# Altium PCB ANE_0002_02AA_0000.PcbDoc
Units mm, origin at the board's own origin, x right, y up, seen from the top; angles counter-clockwise.
Board outline 84 x 65 mm, 2 copper layers (Top Layer, Bottom Layer), stack 0.271 mm thick; 76 components, 44 nets, 229 pads, 61 vias.
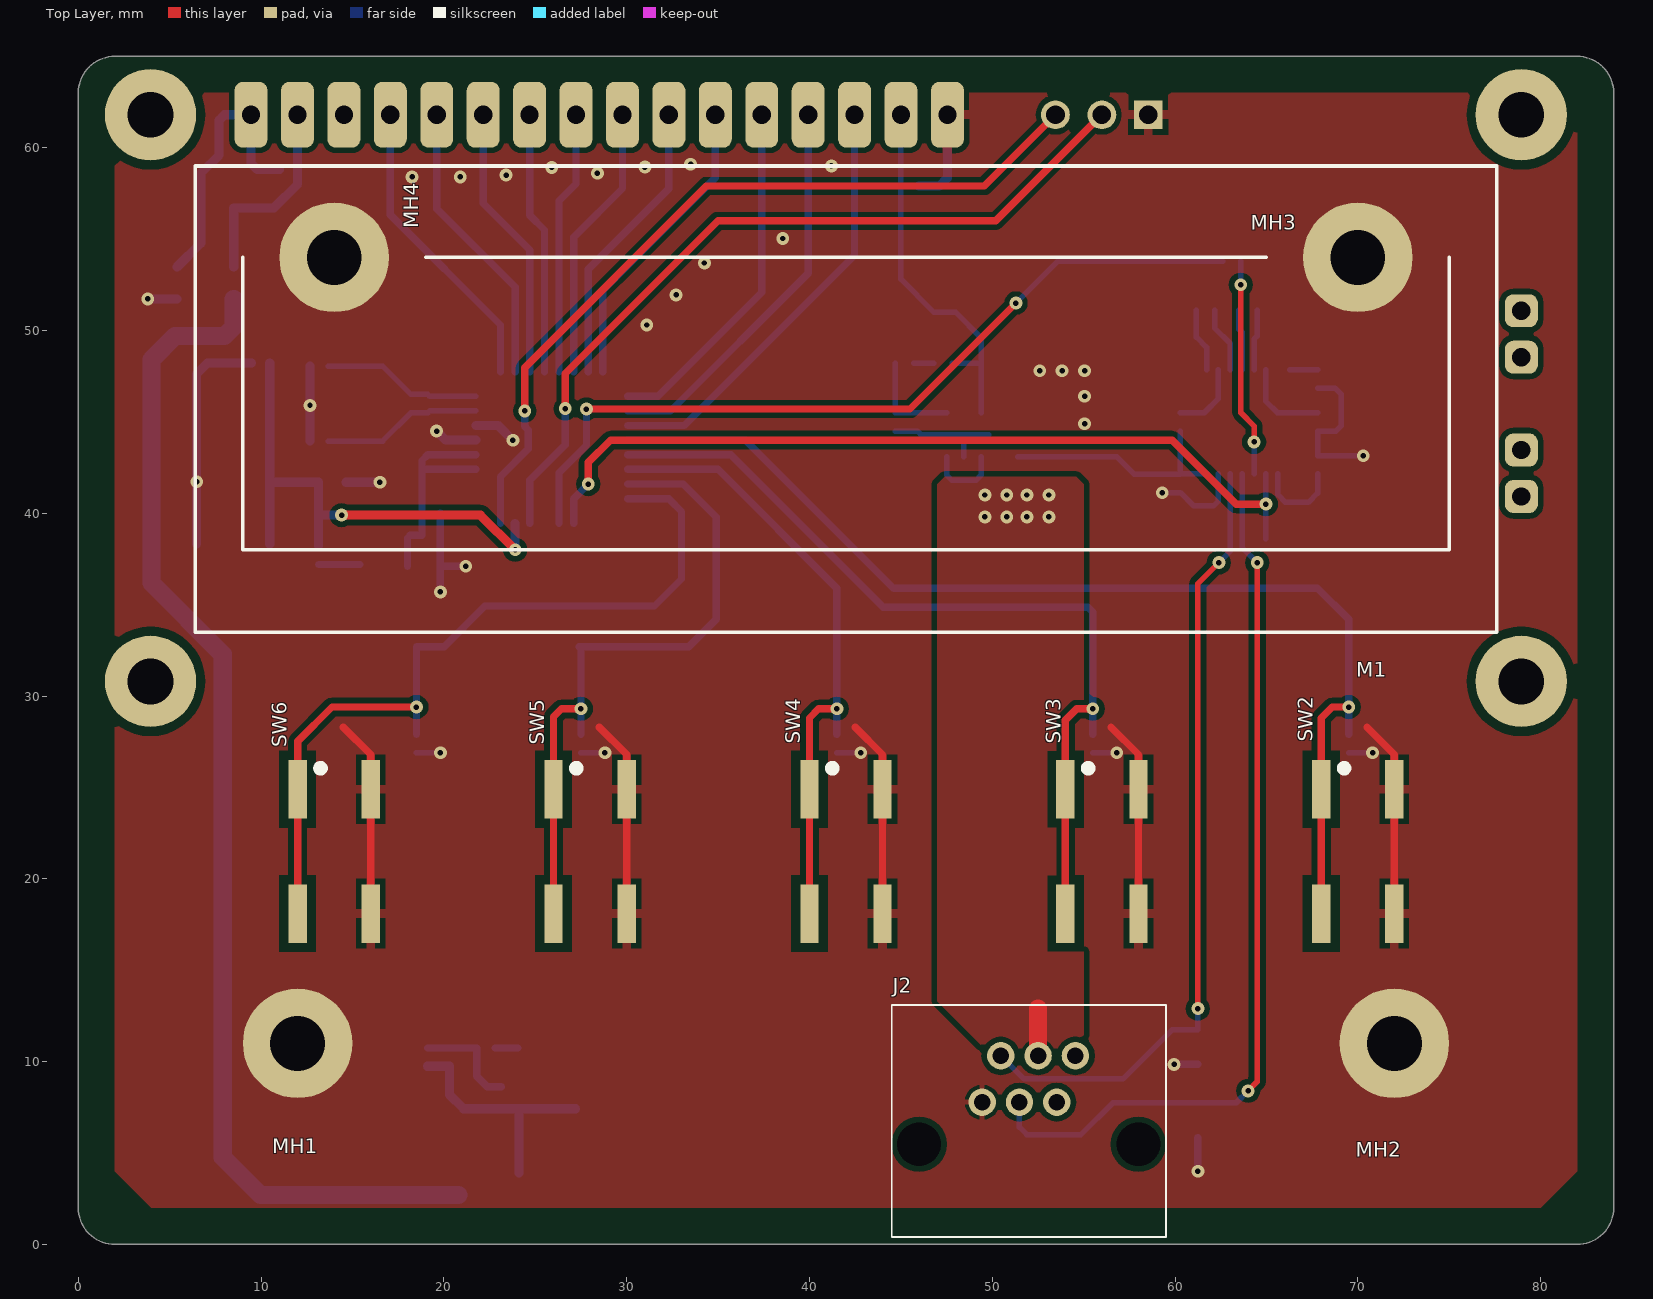
[diagram p0: Top Layer view]
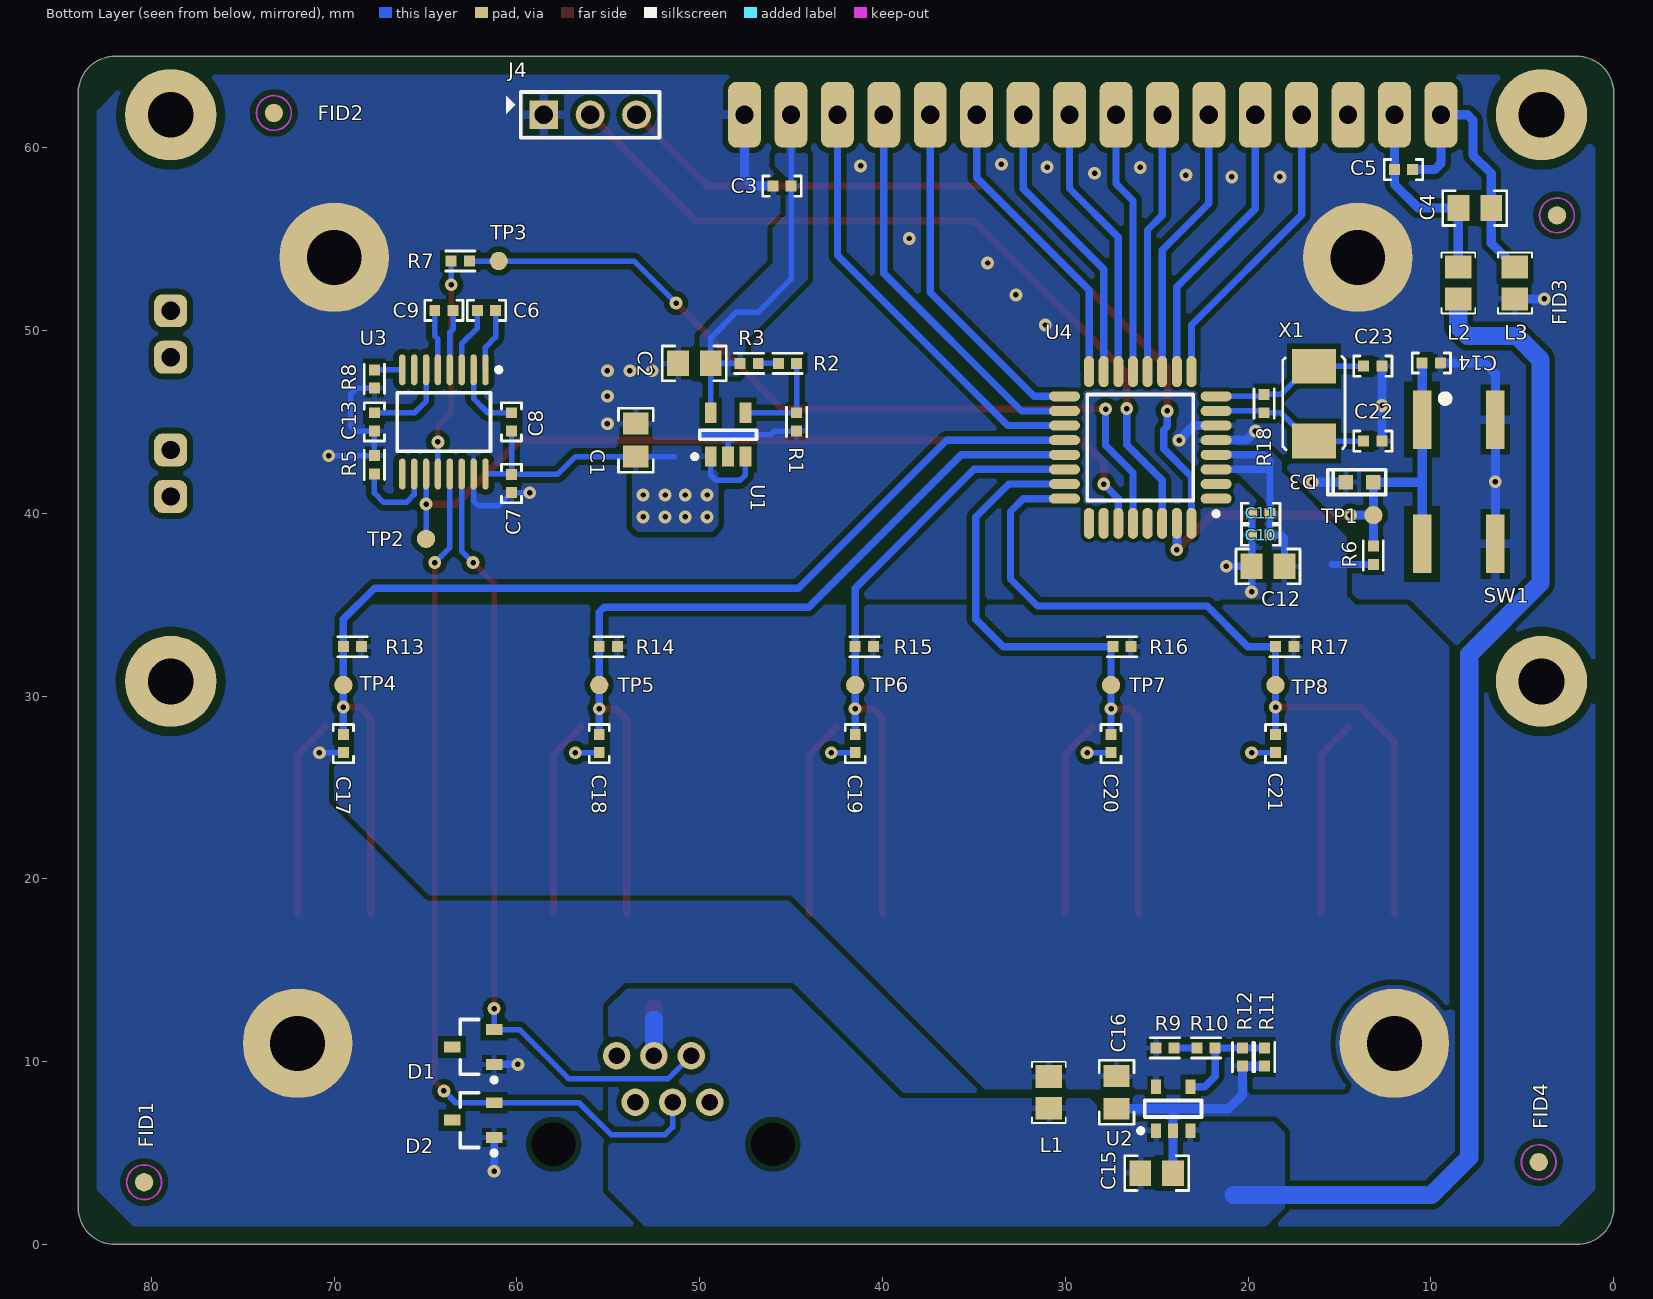
[diagram p1: Bottom Layer view, seen from below]

## Layer stack, top to bottom
Top Solder: solder mask 0.0102, Solder Resist, Dk 3.5
Top Layer: signal copper 0.0356
Dielectric 1: core 0.2, FR-4, Dk 4.2
Bottom Layer: signal copper 0.0356
Bottom Solder: solder mask 0.0102, Solder Resist, Dk 3.5

## Board outline
2,0 cw(c2,2) 0,2 0,63 cw(c2,63) 2,65 82,65 cw(c82,63) 84,63 84,2 cw(c82,2) 82,0

## Design rules (kind name [scope] priority, off if disabled: settings)
AssemblyTestPointUsage [All] p1 off:
AssemblyTestpoint [All] p1 off: testpointundercomponent=TRUE minsize=1.016 maxsize=2.54 preferedsize=1.524 minholesize=0 maxholesize=1.016 preferedholesize=0.813 testpointgrid=0.025 usegrid=TRUE gridtolerance=0 allowsidetop=TRUE allowsidebottom=TRUE
Clearance Clearance_1 [AsMM(PadXSize_AllLayers) > 3] p1: gap=0.5
Clearance Clearance_IC_Pads [HasFootprint('TSOP65P640X120-16N-1') OR HasFootprint('TQFP80P900X900X160-32N')] p2: gap=0.2
Clearance Clearance_Chassis [InNet('CHASSIS1') OR InNet('CHASSIS2') OR InNet('CHASSIS3') OR InNet('CHASSIS4') OR InNet('CHASSIS5') OR InNet('CHASSIS6')] p3: gap=0.4 except(1: Arc-Poly Arc-Region Track-Poly Track-Region SMDPad-Poly SMDPad-Region THPad-Poly THPad-Region Via-Poly Via-Region Fill-Fill Fill-Poly Fill-Region Fill-Text Poly-Poly Poly-Region Poly-Text Region-Region Region-Text)
Clearance Clearance_Poly [IsCopperRegion] p4: gap=0.3
Clearance [All] p5: gap=0.3
ComponentClearance [All] p1 off: gap=0.1 collisioncheckmode=3 verticalgap=2540 showdistances=FALSE
DiffPairsRouting [All] p1 off: maxlimit=0.2 minlimit=0.2 mostfreqgap=0.2 toplayer_minwidth=0.2 toplayer_maxwidth=0.2 toplayer_prefwidth=0.2 bottomlayer_minwidth=0.2 bottomlayer_maxwidth=0.2 bottomlayer_prefwidth=0.2 maxuncoupledlength=12.7
FabricationTestPointUsage [All] p1 off: valid=0 allowmultiple=FALSE
FabricationTestpoint [All] p1 off: side=3 testpointundercomponent=TRUE minsize=1.016 maxsize=2.54 preferedsize=1.524 minholesize=0 maxholesize=1.016 preferedholesize=0.813 testpointgrid=0.025 allowsidetop=TRUE allowsidebottom=TRUE usegrid=TRUE gridtolerance=0
FanoutControl Fanout_BGA [IsBGA] p1 off: bgadir=Out bgaviamode=Centered fanoutstyle=Auto fanoutdirection=Alternating viagrid=0.025 // Fanout_BGA (Default Rule)
FanoutControl Fanout_LCC [IsLCC] p2 off: bgadir=Out bgaviamode=Centered fanoutstyle=Auto fanoutdirection=Alternating viagrid=0.025 // Fanout_LCC (Default Rule)
FanoutControl Fanout_SOIC [IsSOIC] p3 off: bgadir=Out bgaviamode=Centered fanoutstyle=Auto fanoutdirection=Alternating viagrid=0.025 // Fanout_SOIC (Default Rule)
FanoutControl Fanout_Small [(CompPinCount < 5)] p4 off: bgadir=Out bgaviamode=Centered fanoutstyle=Auto fanoutdirection=OutThenIn viagrid=0.025 // Fanout_Small (Default Rule)
FanoutControl Fanout_Default [All] p5 off: bgadir=Out bgaviamode=Centered fanoutstyle=Auto fanoutdirection=Alternating viagrid=0.025 // Fanout_Default (Default Rule)
Height [All] p1 off: minheight=0 maxheight=25.4 prefheight=12.7
HoleSize [All] p1: absolutevalues=TRUE maxlimit=3.2 minlimit=0.025 maxpercent=80.000 minpercent=20.000
HoleToHoleClearance [All] p1: gap=0.2 allowstackedmicrovias=TRUE
MinimumAnnularRing [All] p1: minimumring=0.1
MinimumSolderMaskSliver [All] p1: minsoldermaskwidth=0.1
PlaneClearance [All] p1: clearance=0.3
PlaneConnect PlaneConnect_Via [IsVia] p1: planeconnectstyle=Direct reliefexpansion=0.508 reliefentries=4 reliefconductorwidth=0.254 reliefairgap=0.254
PlaneConnect [All] p2: planeconnectstyle=Relief reliefexpansion=0.4 reliefentries=4 reliefconductorwidth=0.4 reliefairgap=0.4
PolygonConnect PolygonConnect_TP [HasFootprint('TP100')] p1: connectstyle=Direct reliefconductorwidth=0.254 reliefentries=4 polygonreliefangle="90 Angle" airgapwidth=0.254
PolygonConnect PolygonConnect_Large_Pad [AsMM(PadXSize_AllLayers) > 1.51] p2: connectstyle=Relief reliefconductorwidth=0.5 reliefentries=4 polygonreliefangle="90 Angle" airgapwidth=0.3
PolygonConnect PolygonConnect_Via [IsVia] p3: connectstyle=Direct reliefconductorwidth=0.254 reliefentries=4 polygonreliefangle="90 Angle" airgapwidth=0.254
PolygonConnect [All] p4: connectstyle=Relief reliefconductorwidth=0.3 reliefentries=4 polygonreliefangle="90 Angle" airgapwidth=0.2
RoutingLayers [All] p1 off: top layer_v5=TRUE bottom layer_v5=TRUE
RoutingPriority [All] p1 off: routingpriority=0
RoutingTopology [All] p1 off: topology=Shortest
RoutingVias [All] p1: holewidth=0.3 width=0.7 viastyle="Through Hole" minholewidth=0.2 minwidth=0.5 maxholewidth=0.7 maxwidth=1.2
SilkToSilkClearance [All] p1: silktosilkclearance=0.2
SilkToSolderMaskClearance [IsPad] p1: minsilkscreentomaskgap=0.05 clearancetoexposedcopper=FALSE
SolderMaskExpansion SolderMaskExpansion_Small_Pads [AsMM(PadXSize_AllLayers) < 1.5] p1: expansion=0.05
SolderMaskExpansion [All] p2: expansion=0.1
Width [All] p1: maxlimit=2 minlimit=0.2 preferedwidth=0.3
8 further rules are at their usual default settings.

## Components (designator, comment, footprint, x,y, rotation, side; value= is the part's Value field where it differs from the comment)
C1 "1uF" CAPC2012X14N 53.5,44 r270 bottom
C2 "1uF" CAPC2012X14N 50.3,48.2 r180 bottom
C3 "100nF" CAPC1005X06N 45.5,57.9 r180 bottom
C4 "10uF" CAPC2012X09N 7.6,56.7 r0 bottom
C5 "100nF" CAPC1005X06N 11.5,58.8 r0 bottom
C6 "100nF" CAPC1005X06N 61.667,51.1 r180 bottom
C7 "100nF" CAPC1005X06N 60.3,41.625 r90 bottom
C8 "100nF" CAPC1005X06N 60.3,45 r270 bottom
C9 "100nF" CAPC1005X06N 64,51.1 r180 bottom
C10 "100nF" CAPC1005X06N 19.308,38.8 r180 bottom
C11 "100nF" CAPC1005X06N 19.308,40 r180 bottom
C12 "10uF" CAPC2012X09N 18.908,37.1 r180 bottom
C13 "100nF" CAPC1005X06N 67.8,45 r90 bottom
C14 "100nF" CAPC1005X06N 9.975,48.225 r0 bottom
C15 "1uF" CAPC2012X14N 25,3.9 r0 bottom
C16 "1uF" CAPC2012X14N 27.2,8.32 r90 bottom
C17 "100nF" CAPC1005X06N 69.5,27.4 r90 bottom
C18 "100nF" CAPC1005X06N 55.5,27.4 r90 bottom
C19 "100nF" CAPC1005X06N 41.494,27.4 r90 bottom
C20 "100nF" CAPC1005X06N 27.5,27.4 r90 bottom
C21 "100nF" CAPC1005X06N 18.5,27.4 r90 bottom
C22 "18pF" CAPC1005X06N 13.175,43.95 r180 bottom
C23 "18pF" CAPC1005X06N 13.175,48.05 r180 bottom
D1 "PESD15VS2UT" SOT95P230X111-3N 62.4,10.8 r0 bottom
D2 "PESD15VS2UT" SOT95P230X111-3N 62.4,6.8 r0 bottom
D3 "Red" LEDSC16X08X08-2N 13.9,41.7 r180 bottom
FID1 "Fiducial" FIDUCIAL_R1MM0 80.4,3.4 r90 bottom
FID2 "Fiducial" FIDUCIAL_R1MM0 73.3,61.9 r90 bottom
FID3 "Fiducial" FIDUCIAL_R1MM0 3.1,56.3 r90 bottom
FID4 "Fiducial" FIDUCIAL_R1MM0 4.1,4.5 r90 bottom
J2 "RJ11-6P6C" AJ31-1006-TKSR-RPU0 52,7.9 r0 top
J4 "1Row 3 Pin Header" AJ23-1003-T8P0-VFC0 56,61.8 r180 bottom
L1 "60R" INDC2012X10N 30.9,8.32 r270 bottom
L2 "60R" INDC2012X10N 8.5,52.6 r90 bottom
L3 "60R" INDC2012X10N 5.4,52.6 r90 bottom
M1 "LCD" AME0_GLCD_1432_0000 1.45,28.3 r0 top locked
MH1 "AEMT-C00S-1000-0000" TP100#1 12,11 r90 top
MH2 "AEMT-C00S-1000-0000" TP100#1 72,11 r90 top
MH3 "AEMT-C00S-1000-0000" TP100#1 70,54 r90 top
MH4 "AEMT-C00S-1000-0000" TP100#1 14,54 r90 top
R1 "150K" RESC1005X04N 44.7,45 r270 bottom
R2 "150K" RESC1005X04N 45.2,48.2 r180 bottom
R3 "150K" RESC1005X04N 47.3,48.2 r180 bottom
R5 "0R" RESC1005X04N 67.8,42.65 r90 bottom
R6 "330R" RESC1005X04N 13.15,37.7 r270 bottom
R7 "22R" RESC1005X04N 63.1,53.8 r0 bottom
R8 "0R" RESC1005X04N 67.8,47.35 r270 bottom
R9 "150K" RESC1005X04N 24.55,10.749 r180 bottom
R10 "150K" RESC1005X04N 22.3,10.749 r0 bottom
R11 "150K" RESC1005X04N 19.1,10.249 r90 bottom
R12 "150K" RESC1005X04N 20.3,10.249 r90 bottom
R13 "4.7K" RESC1005X04N 69,32.7 r180 bottom
R14 "4.7K" RESC1005X04N 55,32.7 r180 bottom
R15 "4.7K" RESC1005X04N 41,32.7 r180 bottom
R16 "4.7K" RESC1005X04N 26.9,32.7 r180 bottom
R17 "4.7K" RESC1005X04N 18,32.7 r180 bottom
R18 "100R" RESC1005X04N 19.125,46 r90 bottom
SW1 "Push Button" AE22-010S-0000-0000 8.475,41.725 r270 bottom
SW2 "Push Button" AE22-010S-0000-0000 70,21.5 r270 top
SW3 "Push Button" AE22-010S-0000-0000 56,21.5 r270 top
SW4 "Push Button" AE22-010S-0000-0000 42,21.5 r270 top
SW5 "Push Button" AE22-010S-0000-0000 28,21.5 r270 top
SW6 "Push Button" AE22-010S-0000-0000 14,21.5 r270 top
TP1 "AEMT-C00S-1000-0000" TP100#2 13.15,39.9 r90 bottom
TP2 "AEMT-C00S-1000-0000" TP100#2 64.975,38.6 r90 bottom
TP3 "AEMT-C00S-1000-0000" TP100#2 61,53.8 r90 bottom
TP4 "AEMT-C00S-1000-0000" TP100#2 69.5,30.6 r90 bottom
TP5 "AEMT-C00S-1000-0000" TP100#2 55.5,30.6 r90 bottom
TP6 "AEMT-C00S-1000-0000" TP100#2 41.5,30.6 r90 bottom
TP7 "AEMT-C00S-1000-0000" TP100#2 27.5,30.6 r90 bottom
TP8 "AEMT-C00S-1000-0000" TP100#2 18.5,30.6 r90 bottom
U1 "TC1071VCT713" SOT-23-CT5_N 48.45,44.3 r90 bottom
U2 "AP7365-WG-7" SOT95P285X110-5N 24.1,7.42 r90 bottom
U3 "MAX3232EIPWR" TSOP65P640X120-16N 64,45 r270 bottom
U4 "MKE02Z16VLC2" TQFP80P900X900X160-32N 25.9,43.6 r0 bottom
X1 "8MHZ" XTAL50X32X13 16.4,46 r90 bottom

## Footprints (in the part's own frame and the unit in brackets; to place one, negate y for a bottom-side part, rotate by r counter-clockwise, add the part's x,y. Pads: shape width x height; smd on the part's side, far side on the other; paste and mask are expansions set on the pad)
AE22-010S-0000-0000 [mm] "Switch, Push, SMD 6.6x6.0mm, Trip Force 350g"
  rect 3.2x1 smd: 1(-3.4,-2) 1(3.4,-2) 2(-3.4,2) 2(3.4,2)
  silkscreen extent -4.75,-0.95 -4.35,-0.55, body extent -3.3,-3 3.3,3, height 3.1
AJ23-1003-T8P0-VFC0 [mm] "CON, W2B, 3 Pins, 1-Row, 2.54mm, TH, P, VER"
  rect 1.575x1.575 hole 1.016: 1(-2.54,0)
  round 1.575 hole 1.016: 2(0,0) 3(2.54,0)
  silkscreen extent -4.6,-1.25 3.8,1.25, body extent -3.8,-1.25 3.8,1.25, height 5
AJ31-1006-TKSR-RPU0 [mm] "CON, Jack, RJ11, 6 Pins, 1-Row, 1.02 mm, TH, S, RA"
  round 2 hole 2.4 unplated: 0(-6,-2.42) 0(6,-2.42)
  round 1.5 hole 0.9: 1(2.55,2.42) 2(1.53,-0.12) 3(0.51,2.42) 4(-0.51,-0.12) 5(-1.53,2.42) 6(-2.55,-0.12)
  silkscreen extent -7.5,-7.5 7.5,5.2, body extent -7.2,-8.4 7.18,4.6, height 14.1
AME0_GLCD_1432_0000 [mm] "FSTN Graphic LCD 144x32"
  round 5 hole 2.5: 0(2.5,2.5) 0(2.5,33.5) 0(77.5,2.5) 0(77.5,33.5)
  rrect50% 1.8x3.6 hole 1: 1(8,33.5) 2(10.54,33.5) 3(13.08,33.5) 4(15.62,33.5) 5(18.16,33.5) 6(20.7,33.5) 7(23.24,33.5) 8(25.78,33.5) 9(28.32,33.5) 10(30.86,33.5) 11(33.4,33.5) 12(35.94,33.5) 13(38.48,33.5) 14(41.02,33.5) 15(43.56,33.5) 16(46.1,33.5)
  rrect50% 1.8x1.8 hole 1: 17(77.5,22.78) 18(77.5,20.24) 19(77.5,15.16) 20(77.5,12.62)
  silkscreen extent 4.95,5.2 76.15,30.7
CAPC1005X06N [mm] "Capacitor, Chip, 1.00mm L x 0.50mm W x 0.55mm H, IPC Medium Density"
  rect 0.6x0.6 smd: 1(-0.5,0) 2(0.5,0)
  silkscreen extent -1.05,-0.55 1.05,0.55, body extent -0.52,-0.28 0.53,0.27, height 0.55
CAPC2012X09N [mm] "Chip Capacitor, 2-Leads, Body 2,0x1,3mm, IPC Medium Density"
  rect 1.2x1.4 smd: 1(-0.9,0) 2(0.9,0)
  silkscreen extent -1.75,-0.95 1.75,0.95, body extent -1.05,-0.67 1.05,0.67, height 0.95
CAPC2012X14N [mm] "Capacitor, Chip, 2.00mm L x 1.25mm W x 1.35mm H, IPC Medium Density"
  rect 1.2x1.4 smd: 1(-0.9,0) 2(0.9,0)
  silkscreen extent -1.75,-0.95 1.75,0.95, body extent -1.05,-0.67 1.05,0.67, height 1.35
FIDUCIAL_R1MM0 [mm] "Fiducial, Round, 1mm"
  round 1 smd paste-1 mask+0.5: 0(0,0)
  Top Layer keep-out circle w0.1: c0,0 r0.95
INDC2012X10N [mm] "Chip Inductor, 2-Leads, Body 2,0x1,3mm, IPC Medium Density"
  rect 1.25x1.45 smd: 1(-0.875,0) 2(0.875,0)
  silkscreen extent -1.68,-0.92 1.68,0.92, body extent -1.1,-0.72 1.1,0.72, height 1.05
LEDSC16X08X08-2N [mm] "Led, 1,6X0.8X0.8mm, 2 pins"
  rect 0.8x0.8 smd: 1(-0.75,0) 2(0.75,0)
  silkscreen extent -1.75,-0.68 1.43,0.68, body extent -0.8,-0.4 0.8,0.4, height 0.75
RESC1005X04N [mm] "Resistor, Chip, 1.00mm L x 0.50mm W x 0.40mm H, IPC Medium Density"
  rect 0.6x0.6 smd: 1(-0.5,0) 2(0.5,0)
  silkscreen extent -0.8,-0.55 0.8,0.55, body extent -0.52,-0.27 0.53,0.28, height 0.4
SOT95P230X111-3N [mm] "SOT23, 3-Leads, Body 2,90x2,30mm, Pitch 0,95mm, IPC Medium Density"
  rect 0.9x0.6 smd: 1(-1.15,0.95) 2(-1.15,-0.95) 3(1.15,0)
  silkscreen extent -1.27,-1.5 0.7,1.92, body extent -0.7,-1.5 0.7,1.5, height 1.11
SOT95P285X110-5N [mm] "SOT23, 5-Leads, Body 3,00x2,85mm, Pitch 0,95mm, IPC Medium Density"
  rect 0.8x0.55 smd: 1(-1.2,0.95) 2(-1.2,0) 3(-1.2,-0.95) 4(1.2,-0.95) 5(1.2,0.95)
  silkscreen extent -1.32,-1.55 0.45,1.9, body extent -0.85,-1.55 0.85,1.55, height 1.1
SOT-23-CT5_N [mm] "SOT23, 5-Leads, Body 2.9x1.6mm, Pitch 0.95mm, Lead Span 2.7mm, IPC Medium Density"
  rect 1.1x0.65 smd: 1(-1.2,0.95) 2(-1.2,0) 3(-1.2,-0.95) 4(1.2,-0.95) 5(1.2,0.95)
  silkscreen extent -1.32,-1.55 0.25,1.95, body extent -0.9,-1.55 0.9,1.55, height 1.45
TP100#1 [mm] "Test Point, SMD, Circular, 1mm"
  round 6 hole 3 paste-0.5: 1(0,0)
TP100#2 [mm] "Test Point, SMD, Circular, 1mm"
  round 1 smd paste-0.5: 1(0,0)
TQFP80P900X900X160-32N [mm] "TQFP, 32-Leads, Body 9,2x9,2mm (max), Pitch 0,80mm, IPC Medium Density"
  oval 1.7x0.55 smd: 1(-4.15,2.8) 2(-4.15,2) 3(-4.15,1.2) 4(-4.15,0.4) 5(-4.15,-0.4) 6(-4.15,-1.2) 7(-4.15,-2) 8(-4.15,-2.8) 17(4.15,-2.8) 18(4.15,-2) 19(4.15,-1.2) 20(4.15,-0.4) 21(4.15,0.4) 22(4.15,1.2) 23(4.15,2) 24(4.15,2.8)
  oval 0.55x1.7 smd: 9(-2.8,-4.15) 10(-2,-4.15) 11(-1.2,-4.15) 12(-0.4,-4.15) 13(0.4,-4.15) 14(1.2,-4.15) 15(2,-4.15) 16(2.8,-4.15) 25(2.8,4.15) 26(2,4.15) 27(1.2,4.15) 28(0.4,4.15) 29(-0.4,4.15) 30(-1.2,4.15) 31(-2,4.15) 32(-2.8,4.15)
  silkscreen extent -4.27,-2.9 2.9,3.75, body extent -3.5,-3.5 3.5,3.5, height 1.6
TSOP65P640X120-16N [mm] "TSOP, 16-Leads, Body 5,1x4,5mm (max), Pitch 0,65mm, IPC Medium Density"
  oval 1.7x0.35 smd: 1(-2.85,2.275) 2(-2.85,1.625) 3(-2.85,0.975) 4(-2.85,0.325) 5(-2.85,-0.325) 6(-2.85,-0.975) 7(-2.85,-1.625) 8(-2.85,-2.275) 9(2.85,-2.275) 10(2.85,-1.625) 11(2.85,-0.975) 12(2.85,-0.325) 13(2.85,0.325) 14(2.85,0.975) 15(2.85,1.625) 16(2.85,2.275)
  silkscreen extent -2.97,-2.55 1.6,3.12, body extent -2.25,-2.55 2.25,2.55, height 1.2
XTAL50X32X13 [mm] "Crystal, 5.0mm x 3.2mm x 1.3mm, 2 pins, SMD"
  rect 1.9x2.4 smd: 1(-2.05,0) 2(2.05,0)
  silkscreen extent -2.52,-1.7 2.57,1.7, body extent -2.65,-1.75 2.65,1.75, height 1.3

## Part data
C1 C2 C15 C16: library part ACC7-3100-S441-0000, "CAP, CER, X7R, 1uF, %10, 16V, 0805"
C3 C5 C6 C7 C8 C9 C10 C11 C13 C14 C17 C18 C19 C20 C21: library part ACC7-2100-S241-0000, "CAP, CER, X7R, 100nF, %10, 16V, 0402"
C4 C12: library part ACC7-4100-S431-0000, "CAP, CER, X7R, 10uF, %10, 10V, 0805"
C22 C23: library part ACC0-Y180-S272-0000, "CAP, CER, C0G, 18pF, %5, 50V, 0402"
D1 D2: library part AS1H-950M-SI20-0000, "Diode, TVS, ESD Protection, 15V, PESD15VS2UT, SOT-23"
D3: library part AS42-730L-SC50-0000, "LED, Red, 627 nm, 15 mcd, 120 degree, 2V, SMD, 0603"
FID1 FID2 FID3 FID4: library part FIDUCIAL_R1MM0, "Fiducial, Round, 1mm"
J2: library part AJ31-1006-TKSR-RPU0, "CON, Jack, 6P6C, 1 Row, 6 Pins, 1.02 mm, TH, S, RA"
J4: library part AJ23-1003-T8P0-VFC0, "CON, W2B, 3 Pins, 1-Row, 2.54mm, TH, P, VER"
L1 L2 L3: library part AL5F-1600-S236-3350, "Inductor, Ferrite Bead, 3.5A, 60 Ohm, SMD"
M1: library part AME0_GLCD_1432_0000, "Module, LCD, Graph, 144x32, FSTN+ 5V0"
MH1 MH2 MH3 MH4 TP1 TP2 TP3 TP4 TP5 TP6 TP7 TP8: "Test Point, Circular, 1mm"
R1 R2 R3 R9 R10 R11 R12: library part AR19-5150-S2B2-0000, "RES, E24, Thick Film, SMD, 150K, 1%, 0.1W, 0402"
R5 R8: library part AR19-0000-S201-0000, "RES, Thick Film, SMD, 0R, Jumper, 0.1W, 0402"
R6: library part AR19-2330-S2B2-0000, "RES, E24, Thick Film, SMD, 330R, 1%, 0.1W, 0402"
R7: library part AR19-1220-S2B2-0000, "RES, E24, Thick Film, SMD, 22R, 1%, 0.1W, 0402"
R13 R14 R15 R16 R17: library part AR19-3470-S2B2-0000, "RES, E24, Thick Film, SMD, 4.7K, 1%, 0.1W, 0402"
R18: library part AR19-2100-S2B2-0000, "RES, E24, Thick Film, SMD, 100R, 1%, 0.1W, 0402"
SW1 SW2 SW3 SW4 SW5 SW6: library part AE22-010S-0000-0000, "Switch, Push, SMD 6.6x6.0mm, Trip Force 350g"
U1: "50mA, 100mA and 150mA Adjustable CMOS LDOs with Shutdown, 5-Pin SOT-23, Extended Temperature, Tape and Reel"
U2: library part AT8T-0000-SM90-1843, "IC, PMIC, LDO, 2-6V In, Adj Vout, 600 mA LDO, AP7365-WG-7, SOT-25-5"
U3: library part AT41-0000-SM90-0540, "IC, Interface, RS232 Driver, MAX3232EIPWR, TSSOP-16"
U4: library part AT35-0000-SF80-1842, "IC, Embedded, Microcontroller, MKE02Z16VLC2, LQFP32"
X1: library part AX20-6800-S000-0000, "Crystal, Fund, 8 MHZ, 20ppm, 18pF, SMD"

## Via types
v1: diameter 0.7, hole 0.3, Top Layer to Bottom Layer, tented both sides, 61 vias

## Nets (pads, with @x,y where several pads share a name; then routed paths per layer and width w, separated by ;. In a path a pad name is that pad's centre, name@x,y a point inside that pad or via, vN(x,y) a via of type N, cw(c..) or ccw(c..) an arc to the next point about the centre after c; other vN are vias at no path point)
5V0: C1.2 C7.2 C8.2 C15.2 J2.3 L1.2 L2.1 U1.1 U1.3 U2.1 U2.3 U3.16 | length 87.6
  Top Layer w1: J2.3 52.51,12.89
  Bottom Layer w0.3: U1.3 47.5,42.1 47.8,41.8 49.1,41.8 49.4,42.1 U1.1 ; 51.4,43.1 C1.2 56.8,43.1 57.775,42.125 C7.2 ; C8.2 C7.2 ; U3.16 60.325,42.15 C7.2
  Bottom Layer w1: L2.1 8.5,50.2 8,49.7 5.3,49.7 4,48.4 4,36.185 7.9,32.285 7.9,4.773 9.973,2.7 20.8,2.7 ; J2.3 52.51,12.29
  other v1: 49.6,39.8 50.8,39.8 51.9,39.8 53.1,39.8 49.6,41 50.8,41 51.9,41 53.1,41
BUTTON_1: C17.2 R13.1 SW2.1 TP4.1 U4.20 | length 62.3
  Top Layer w0.4: SW2.1@68,18.1 68,24.9 68,28.8 68.6,29.4 v1(69.5,29.4)
  Bottom Layer w0.4: U4.20 36.5,44 44.6,35.9 67.8,35.9 69.5,34.2 v1(69.5,29.4) C17.2
BUTTON_2: C18.2 R14.1 SW3.1 TP5.1 U4.21 | length 48
  Top Layer w0.4: SW3.1@54,18.1 54,24.9 54,28.672 54.628,29.3 v1(55.5,29.3)
  Bottom Layer w0.4: U4.21 35.7,43.2 44.041,34.859 55.241,34.859 55.5,34.6 TP5.1 v1(55.5,29.3) C18.2
BUTTON_3: C19.2 R15.1 SW4.1 TP6.1 U4.22 | length 34.6
  Top Layer w0.4: SW4.1@40,18.1 40,24.9 40,28.8 40.5,29.3 v1(41.5,29.3)
  Bottom Layer w0.4: U4.22 35,42.4 41.5,35.9 TP6.1 v1(41.5,29.3) 41.494,29.294 C19.2
BUTTON_4: C20.2 R16.1 SW5.1 TP7.1 U4.23 | length 36.6
  Top Layer w0.4: SW5.1@26,18.1 26,24.9 26,28.867 26.433,29.3 v1(27.5,29.3)
  Bottom Layer w0.4: C20.2 v1(27.5,29.3) TP7.1 27.5,32.6 R16.1 33.4,32.7 34.9,34.2 34.9,39.8 33.1,41.6 U4.23
BUTTON_5: C21.2 R17.1 SW6.1 TP8.1 U4.24 | length 44.5
  Top Layer w0.4: SW6.1@12,18.1 12,24.9 12,27.521 13.879,29.4 v1(18.5,29.4)
  Bottom Layer w0.4: C21.2 v1(18.5,29.4) ; v1(18.5,29.4) TP8.1 R17.1 20.016,32.7 22.241,34.925 31.525,34.925 33,36.4 33,40.1 32.3,40.8 U4.24
GND: C1.1 C2.1 C3.1 C7.1 C10.1 C11.1 C12.1 C13.1 C14.1 C15.1 C16.1 C17.1 C18.1 C19.1 C20.1 C21.1 C22.2 C23.2 D1.1 D2.1 D3.1 J2.6 J4.1 L3.1 M1.16 MH1.1 MH2.1 MH3.1 MH4.1 R1.2 R5.2 R8.2 R11.1 R12.1 SW1.2 SW2.2 SW3.2 SW4.2 SW5.2 SW6.2 U1.2 U2.2 U3.15 U4.5 U4.6 | length 132.7
  Top Layer w0.4: 14.5,28.3 16,26.8 16,24.9 SW6.2@16,18.1 ; 28.5,28.3 30,26.8 30,24.9 SW5.2@30,18.1 ; 42.5,28.3 44,26.8 44,24.9 SW4.2@44,18.1 ; 56.5,28.3 58,26.8 58,24.9 SW3.2@58,18.1 ; 70.5,28.3 72,26.8 72,24.9 SW2.2@72,18.1
  Bottom Layer w0.3: C21.1 v1(19.808,26.9) ; C20.1 v1(28.808,26.9) ; C19.1 v1(42.802,26.9) ; R1.2 45.9,44.5 46.1,44.3 48.45,44.3 ; U1.2 48.45,44.3 ; 49.8,44.3 48.45,44.3 ; C18.1 v1(56.808,26.9) ; v1(59.3,41.125) C7.1 61.025,40.4 62.1,40.4 62.375,40.675 U3.15 ; R8.2 68.75,46.85 69.1,46.5 69.1,44.8 68.8,44.5 C13.1 R5.2 v1(70.3,43.15) ; C17.1 v1(70.808,26.9)
  Bottom Layer w0.4: v1(19.808,35.7) C12.1 C10.1 C11.1 ; C12.1@19.808,37.1 v1(21.2,37.1) ; v1(59.95,9.85) D1.1 ; v1(61.25,4) D2.1
  Bottom Layer w0.5: v1(3.8,51.725) L3.1 ; SW1.2@6.475,38.325 v1(6.475,41.725) 6.475,45.125 6.475,47.625 7.075,48.225 C14.1 ; C22.2 v1(12.675,45.9) C23.2 ; D3.1 v1(16.5,41.7) ; R11.1 R12.1 20.3,8.2 21.08,7.42 24.1,7.42 ; v1(19.6,44.5) 20.1,44 U4.5 ; U4.6 22.974,44.8 v1(23.774,44) ; C15.1 U2.2 24.1,7.42 ; C16.1 24.1,7.42 ; C3.1 47.1,57.9 47.55,58.35 M1.16
  other v1: 55.05,44.9 55.05,46.4 52.6,47.8 53.825,47.8 55.05,47.8 31.1,50.3 32.7,51.949 34.256,53.692 38.543,55.032 18.261,58.4 20.9,58.4 23.4,58.5 28.4,58.601 25.9,58.92 31,58.938 41.2,59 33.5,59.1
LCD_DB0: M1.7 U4.12 | length 14.4
  Bottom Layer w0.4: M1.7 24.69,56.31 25.5,55.5 U4.12
LCD_DB1: M1.8 U4.13 | length 14.4
  Bottom Layer w0.4: U4.13 26.3,57.1 27.23,58.03 M1.8
LCD_DB2: M1.9 U4.14 | length 15.2
  Bottom Layer w0.4: U4.14 27.1,55.1 29.77,57.77 M1.9
LCD_DB3: M1.10 U4.15 | length 15.9
  Bottom Layer w0.4: U4.15 27.9,53.35 32.31,57.76 M1.10
LCD_DB4: M1.11 U4.16 | length 16.6
  Bottom Layer w0.4: U4.16 28.7,52.2 34.85,58.35 M1.11
LCD_DB5: M1.12 U4.17 | length 19.4
  Bottom Layer w0.4: U4.17 31.712,46.4 37.39,52.078 M1.12
LCD_DB6: M1.13 U4.18 | length 21.7
  Bottom Layer w0.4: U4.18 32.4,45.6 39.93,53.13 M1.13
LCD_DB7: M1.14 U4.19 | length 24
  Bottom Layer w0.4: U4.19 33.15,44.8 42.47,54.12 M1.14
LCD_E: M1.6 U4.11 | length 15.1
  Bottom Layer w0.4: M1.6 22.15,56.95 24.7,54.4 U4.11
LCD_R/W: M1.5 U4.10 | length 15.8
  Bottom Layer w0.4: M1.5 19.61,56.665 23.9,52.375 U4.10
LCD_RS: M1.4 U4.9 | length 16.5
  Bottom Layer w0.4: M1.4 17.07,56.33 23.1,50.3 U4.9
MCU_EXTAL: C22.1 R18.1 U4.7 X1.1 | length 8.8
  Bottom Layer w0.3: C22.1 X1.1 16.65,43.95 18.2,45.5 R18.1 19.225,45.6 U4.7
MCU_RST: C14.2 D3.2 R6.1 SW1.1 TP1.1 U4.31 | length 29.1
  Top Layer w0.5: v1(14.4,39.9) 22,39.9 v1(23.9,38)
  Bottom Layer w0.5: SW1.1@10.475,38.325 10.475,42.7 10.475,45.125 C14.2 ; 10.475,41.7 D3.2 TP1.1 ; R6.1 TP1.1 ; v1(14.4,39.9) TP1.1 ; v1(23.9,38) U4.31
MCU_VDD: C10.2 C11.2 C12.2 C16.2 L1.1 R6.2 R9.1 R13.2 R14.2 R15.2 R16.2 R17.2 U2.5 U4.3 U4.4 | length 14.7
  Bottom Layer w0.4: R6.2 15.4,37.2 ; C12.2 18.008,38.65 18.158,38.8 C10.2 C11.2 18.808,42.883 19.125,43.2 U4.4 ; 18.85,42.4 U4.3
MCU_XTAL: C23.1 R18.2 U4.8 X1.2 | length 8.8
  Bottom Layer w0.3: C23.1 X1.2 16.65,48.05 18.2,46.5 R18.2 19.225,46.4 U4.8
NetC2_2: C2.2 C3.2 M1.15 R3.1 U1.5 | length 20.4
  Bottom Layer w0.3: M1.15 45,61.79 C3.2 45,52.81 46.818,50.992 48.008,50.992 49.4,49.6 C2.2 ; R3.1 C2.2 ; U1.5 C2.2
NetC4_1: C4.1 C5.1 L3.2 M1.1 | length 15.2
  Bottom Layer w0.5: L3.2 6.7,54.775 C4.1 6.7,58.593 7.7,59.593 7.7,61.5 8,61.8 M1.1 9.45,59.15 9.8,58.8 C5.1
NetC4_2: C4.2 C5.2 L2.2 M1.2 | length 11.1
  Bottom Layer w0.5: L2.2 C4.2 10.7,56.7 12,58 C5.2 ; C5.2@11.99,58.81 M1.2
NetC6_1: C6.1 U3.3 | length 3.6
  Bottom Layer w0.3: C6.1 62.167,50.133 63.025,49.275 U3.3
NetC6_2: C6.2 U3.1 | length 3.5
  Bottom Layer w0.3: C6.2 61.167,49.633 61.725,49.075 U3.1
NetC8_1: C8.1 U3.2 | length 4
  Bottom Layer w0.3: C8.1 61.6,45.5 62.375,46.275 U3.2
NetC9_1: C9.1 U3.5 | length 3.3
  Bottom Layer w0.3: U3.5 64.325,49.525 64.5,49.7 C9.1
NetC9_2: C9.2 U3.4 | length 3.3
  Bottom Layer w0.3: C9.2 63.5,50.075 63.675,49.9 U3.4
NetC13_2: C13.2 U3.6 | length 4.8
  Bottom Layer w0.3: U3.6 64.975,46.125 65.6,45.5 C13.2
NetR1_1: R1.1 R2.2 U1.4 | length 5.5
  Bottom Layer w0.3: R2.2 R1.1 U1.4
NetR2_1: R2.1 R3.2 | length 1.1
  Bottom Layer w0.3: R2.1 R3.2
NetR5_1: R5.1 U3.10 | length 4.7
  Bottom Layer w0.3: U3.10 65.625,41.015 66.04,40.6 67.3,40.6 67.8,41.1 R5.1
NetR7_2: R7.2 U3.12 | length 12
  Top Layer w0.3: v1(63.6,52.5) 63.6,45.5 64.325,44.775 v1(64.325,43.9)
  Bottom Layer w0.3: v1(63.6,52.5) R7.2 ; U3.12 v1(64.325,43.9)
NetR8_1: R8.1 U3.8 | length 1.5
  Bottom Layer w0.3: U3.8 R8.1
NetR9_2: R9.2 R10.2 | length 1.3
  Bottom Layer w0.4: R10.2 R9.2
NetR10_1: R10.1 R11.2 R12.2 U2.4 | length 5.8
  Bottom Layer w0.4: R11.2 R12.2 R10.1 21.8,9.2 22.38,8.62 U2.4
RS232_1_RX: D2.2 J2.4 U3.13 | length 49.3
  Top Layer w0.3: v1(64,8.4) 64.5,8.9 v1(64.5,37.3)
  Bottom Layer w0.3: J2.4 51.49,6.41 51.9,6 54.85,6 56.6,7.75 D2.2 63.35,7.75 v1(64,8.4) ; U3.13 63.675,38.125 v1(64.5,37.3)
RS232_1_RXD: R7.1 TP3.1 U4.28 | length 45
  Top Layer w0.4: v1(27.8,45.7) 45.5,45.7 v1(51.3,51.5)
  Bottom Layer w0.3: v1(51.3,51.5) 53.6,53.8 TP3.1 R7.1
  Bottom Layer w0.4: U4.28 26.3,42.223 27.8,43.723 v1(27.8,45.7)
RS232_1_TX: D1.2 J2.5 U3.14 | length 43.6
  Top Layer w0.3: v1(61.25,12.9) 61.25,36.15 v1(62.4,37.3)
  Bottom Layer w0.3: J2.5 51.74,9.05 57.15,9.05 59.85,11.75 D1.2 v1(61.25,12.9) ; v1(62.4,37.3) 63.025,37.925 U3.14
RS232_1_TXD: TP2.1 U3.11 U4.27 | length 46.2
  Top Layer w0.4: v1(27.9,41.6) 27.9,42.783 29.117,44 59.856,44 63.356,40.5 v1(64.975,40.5)
  Bottom Layer w0.3: TP2.1 v1(64.975,40.5) U3.11
  Bottom Layer w0.4: U4.27 27.1,40.8 v1(27.9,41.6)
SWD_CLK: J4.2 U4.30 | length 44.2
  Top Layer w0.4: v1(26.645,45.725) 26.645,47.645 35,56 50.2,56 J4.2
  Bottom Layer w0.4: U4.30 24.7,41.8 26.645,43.745 v1(26.645,45.725)
SWD_DIO: J4.3 U4.32 | length 44
  Top Layer w0.4: v1(24.42,45.6) 24.42,47.97 34.35,57.9 49.56,57.9 J4.3
  Bottom Layer w0.4: U4.32 23.1,42 24.624,43.524 24.624,44.557 24.42,44.761 v1(24.42,45.6)
pads on no net: D1.3 D2.3 FID1.0 FID2.0 FID3.0 FID4.0 J2.0 J2.1 J2.2 M1.0 M1.3 M1.17 M1.18 M1.19 M1.20 U3.7 U3.9 U4.1 U4.2 U4.25 U4.26 U4.29

## Polygon pours and split planes (outlines as drawn)
GND on Top Layer "GND" (solid, pour order 48): 4,2 2,4 2,59 6,63 80,63 82,61 82,4 80,2 75.7,2
5V0 on Top Layer "5V0" (solid, pour order 47): 50.9,9.4 47,13.3 47,38 47,41.6 47.4,42 54.6,42 55,41.6 55,10.4 54,9.4
GND on Bottom Layer "GND" (solid, pour order 56): 1,60 5,64 81,64 83,62 83,3 81,1 3,1 1,3
GND on Bottom Layer "GND" (solid, pour order 51): 55.5,44.5 55.5,48.35 55.05,48.8 54.35,49.5 53.575,49.5 51.2,49.5 50.896,49.196 50.896,45.096 50.5,44.7 48.1,44.7 47.9,44.5 47.9,44 48.1,43.8 49.9,43.8 50.2,44.1 55.1,44.1
5V0 on Bottom Layer "5V0" (solid, pour order 50): 52.8,43.7 49.1,43.7 49,43.6 49,39.342 49.293,39 53.4,39 53.7,39.3 53.7,43.7
MCU_VDD on Bottom Layer "MCU_VDD" (solid, pour order 55): 14.1,35 11.3,35 9,32.7 9,29.9 9,12 12.5,8.5 20.5,8.5 34.4,8.5 45,19.1 64.8,19.1 70,24.3 70,33 68,35
5V0 on Bottom Layer "5V0" (solid, pour order 54): 18.6,6.7 18,6.1 18,2.008 19.008,1 53,1 55,3 55,13 54,14 45,14 42,11 39,8 31,8 29.308,8 28.656,8 28.278,7.622 28.278,6.7
MCU_VDD on Bottom Layer "MCU_VDD" (solid, pour order 53): 18.7,38.284 19.016,38.6 19.1,38.684 19.1,40.4 19.1,40.707 20.493,42.1 21.9,42.1 22.3,42.1 22.6,42.4 22.6,43 22.6,43.2 22.4,43.4 18.744,43.4 18.167,42.823 18.167,42.267 14.6,38.7 14.6,35.5 13.8,34.7 13.8,33.5 17.76,33.5 18.6,34.34 18.7,34.44 19.016,34.6 19.193,35 18.7,35.5
NetC2_2 on Bottom Layer "C2" (solid, pour order 52): 49.2,47.5 47.65,47.5 47.5,47.65 47.5,49.4 47,49.9 44.1,52.8 44.1,61 44.1,61.7 44.5,62.1 45.5,62.1 45.8,61.8 45.9,61.7 45.9,60.2 45.9,59 45.5,58.6 45.3,58.4 45.3,57.9 45.3,56.3 46,55.6 46,53.7 48.9,50.8 50,49.7 50,48.1 50,47.741 49.759,47.5
GND on Bottom Layer "GND" (solid, pour order 49): 45.8,57.9 45.8,56.9 45.9,56.8 46.1,56.6 46.7,56.6 47.6,56.6 47.8,56.8 48.45,57.45 48.45,61.1 48.15,61.4 47.55,61.4 47.2,61.4 46.8,61 46.7,60.9 46.7,59.3 46.7,58.5 46.5,58.3 46.4,58.2 45.9,58.2 45.8,58.1 45.8,57.9

## Silkscreen, mask and mechanical layers (free items; w line width, h text height)
Mechanical 1:
  the board outline again, w0.2
Mechanical 15:
  lines w0.2: 48,0 48,6.5 56,6.5 56,0